# Altium PCB ZondPhonoPreamp.PcbDoc
Units mm, origin at the board's own origin, x right, y up, seen from the top; angles counter-clockwise.
Board outline 160.02 x 159.38 mm, 2 copper layers (Top Layer, Bottom Layer); 132 components, 61 nets, 302 pads, 30 vias.
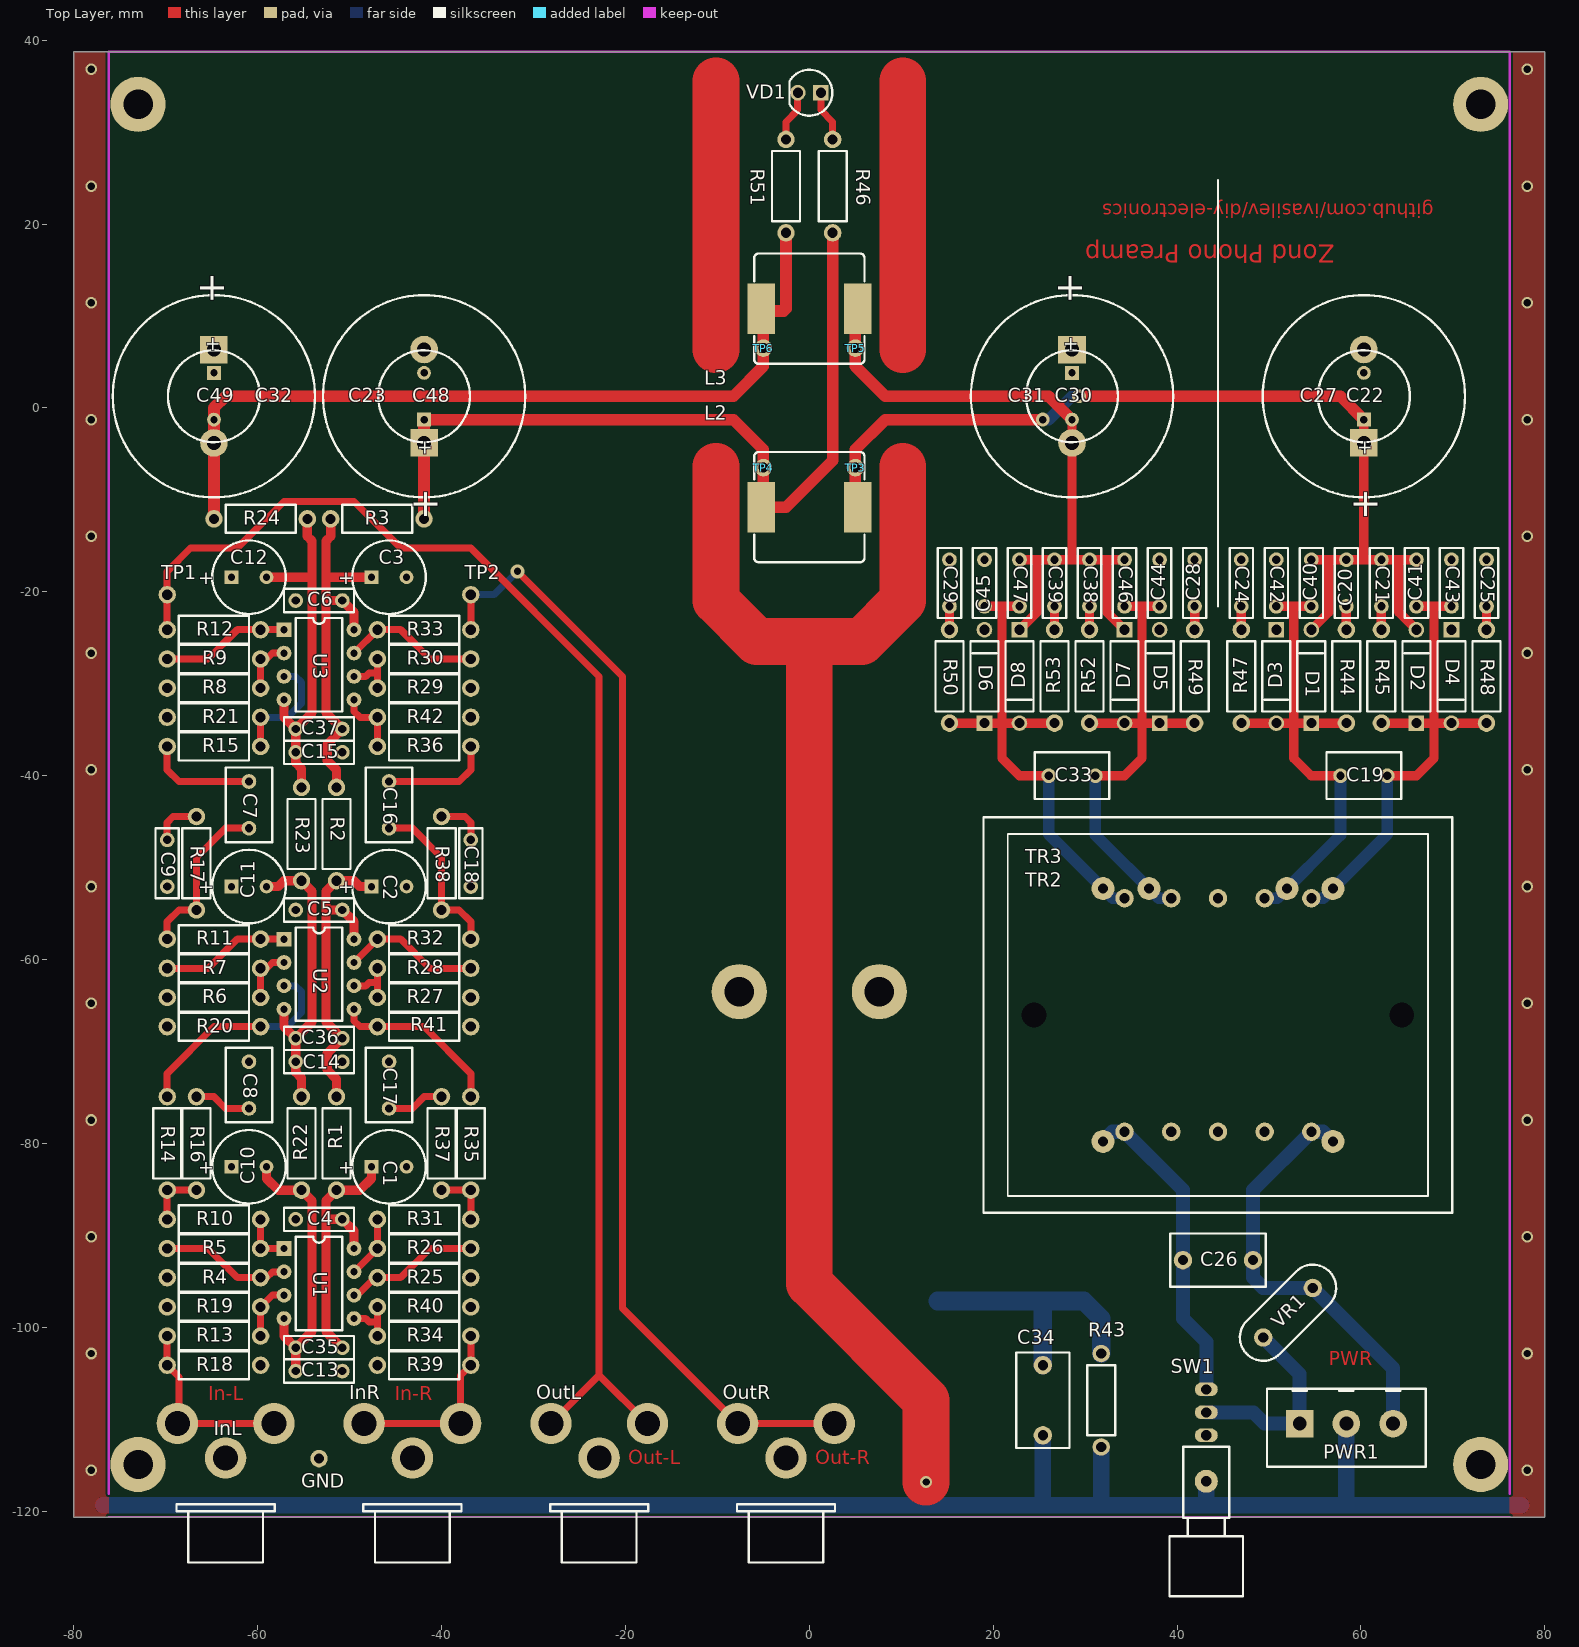
[diagram p0: Top Layer view]
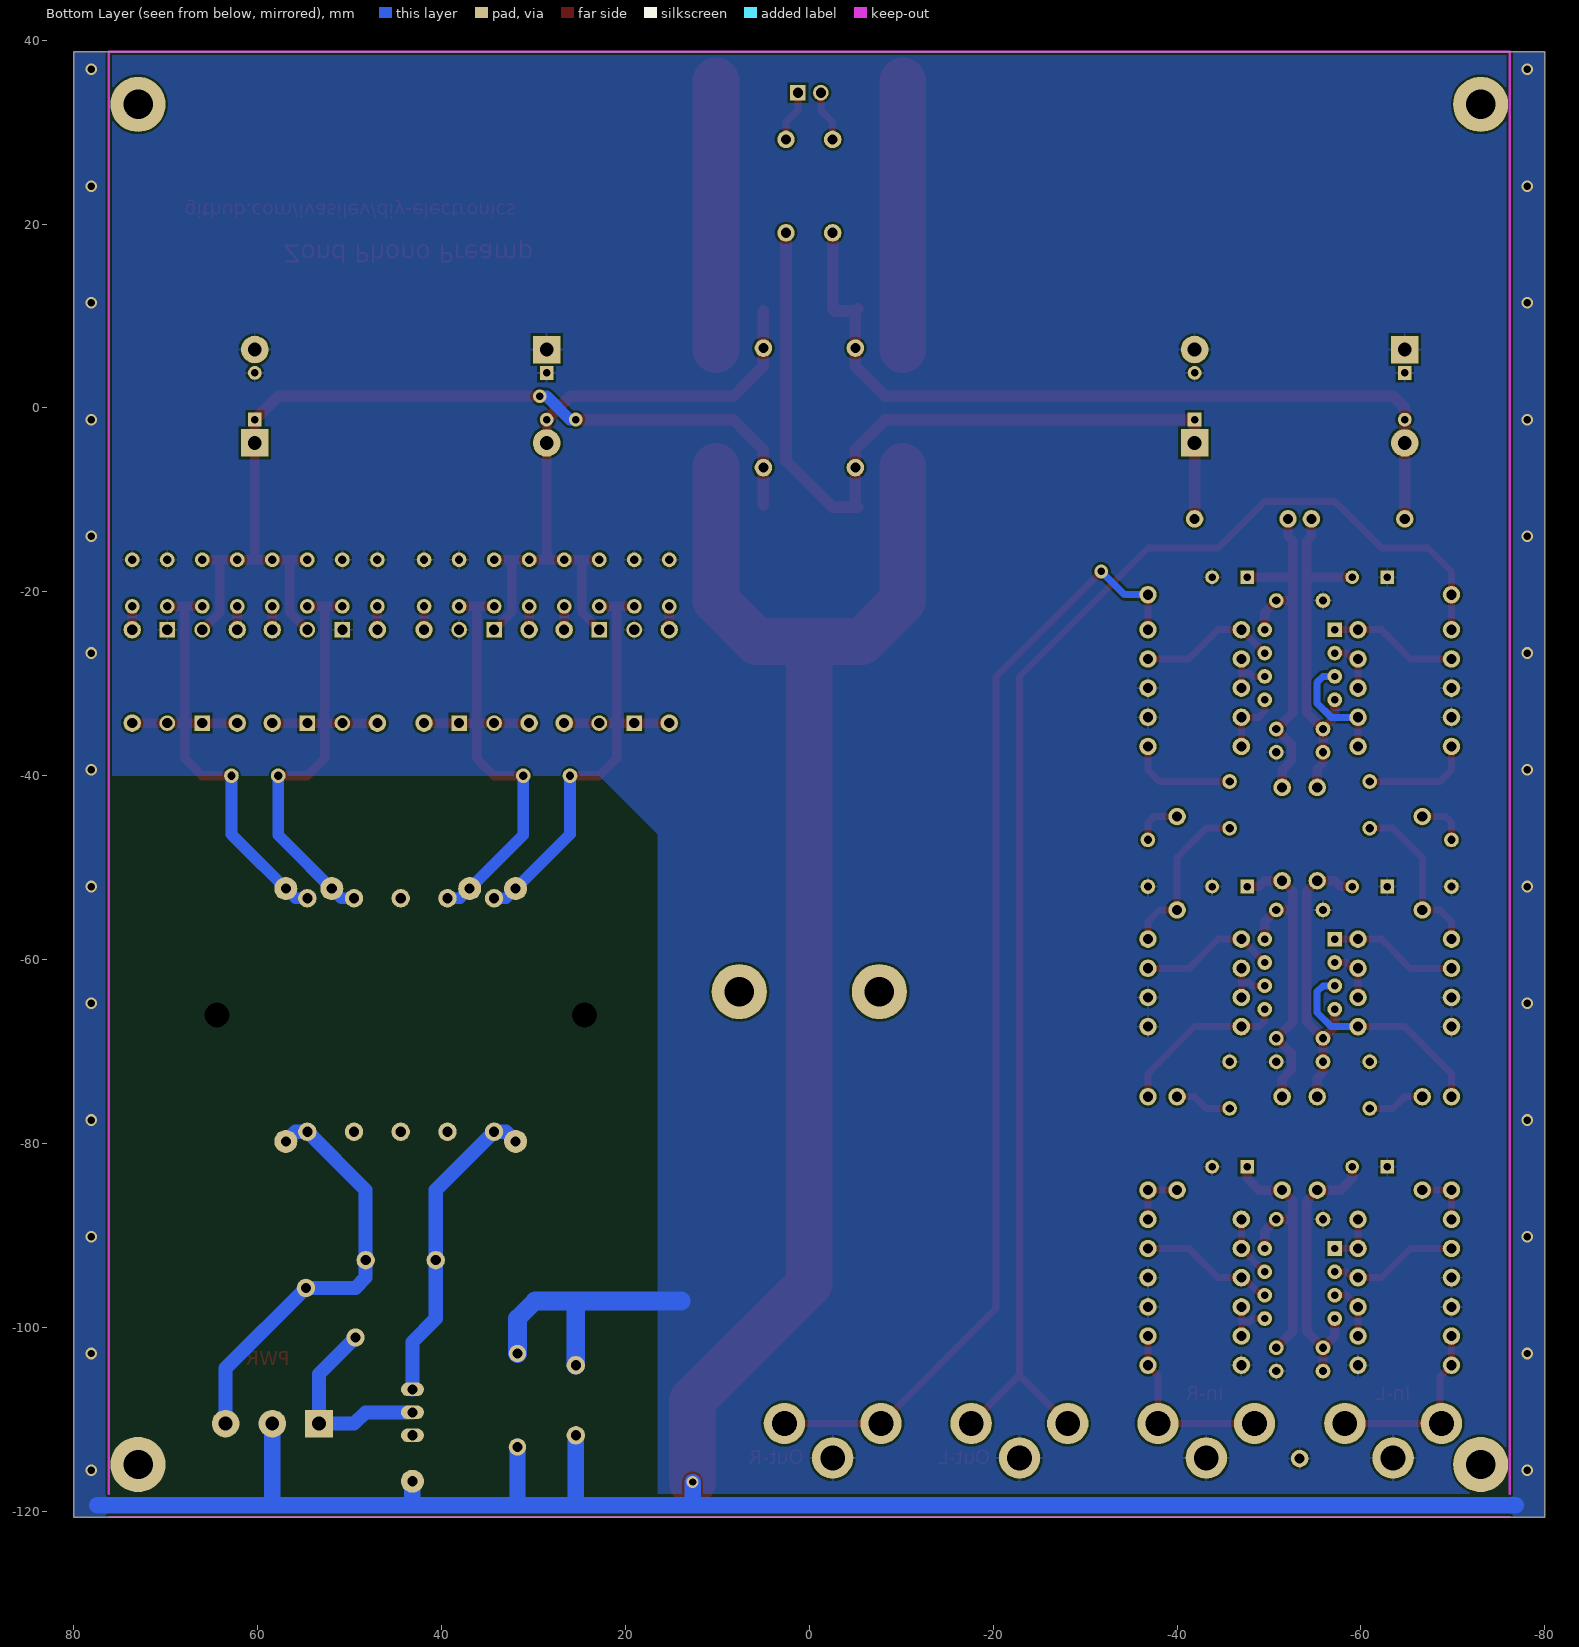
[diagram p1: Bottom Layer view, seen from below]

## Layer stack, top to bottom
Top Layer: signal copper 0.0356
Dielectric: dielectric 0.32, FR-4, Dk 4.8
Bottom Layer: signal copper 0.0356

## Board outline
-80.01,-120.65 -80.01,38.735 80.01,38.735 80.01,-120.65

## Design rules (kind name [scope] priority, off if disabled: settings)
Clearance [All] p1: gap=0.254
ComponentClearance [All] p1: gap=0.254 collisioncheckmode=3 verticalgap=0.254
Height [All] p1: minheight=0 maxheight=50.8 prefheight=12.7
HoleSize [All] p1: absolutevalues=TRUE maxlimit=3.81 minlimit=0.597 maxpercent=80.000 minpercent=20.000
PolygonConnect PolygonConnect_1 [IsVia] p1: connectstyle=Direct reliefconductorwidth=0.254 reliefentries=4 polygonreliefangle="90 Angle"
PolygonConnect [All] p2: connectstyle=Relief reliefconductorwidth=0.254 reliefentries=4 polygonreliefangle="90 Angle"
RoutingVias [All] p1: holewidth=0.711 width=1.27 viastyle="Through Hole" minholewidth=0.711 minwidth=1.27 maxholewidth=0.711 maxwidth=1.27
SolderMaskExpansion [All] p1: expansion=0.102
TestPointUsage [All] p1: valid=0 allowmultiple=FALSE
Testpoint [All] p1: side=15 testpointundercomponent=TRUE minsize=1.016 maxsize=2.54 preferedsize=1.524 minholesize=0 maxholesize=1.016 preferedholesize=0.813 testpointgrid=0.025 style=1023 order=0123456789
Width [All] p1: maxlimit=5.08 minlimit=0.254 preferedwidth=0.254 minimp=50.000000 maximp=50.000000 favimp=50.000000
16 further rules are at their usual default settings.

## Classes and differential pairs
component class U_Power: C19 C20 C21 C22 C23 C24 C25 C26 C27 C28 C29 C30 C31 C32 C33 C34 C38 C39 C40 C41 C42 C43 C44 C45 C46 C47 C48 C49 D1 D2 D3 D4 D5 D6 D7 D8 GND L2 L3 PWR1 R43 R44 R45 R46 R47 R48 R49 R50 R51 R52 R53 SW1 TP3 TP4 TP5 TP6 TR2 TR3 VD1 VR1
component class U_Amplifier_Right: C16 C17 C18 InR OutR R25 R26 R27 R28 R29 R30 R31 R32 R33 R34 R35 R36 R37 R38 R39 R40 R41 R42 TP2
component class U_Amplifier_Left: C1 C2 C3 C4 C5 C6 C7 C8 C9 C10 C11 C12 C13 C14 C15 C35 C36 C37 InL OutL R1 R2 R3 R4 R5 R6 R7 R8 R9 R10 R11 R12 R13 R14 R15 R16 R17 R18 R19 R20 R21 R22 R23 R24 TP1 U1 U2 U3

## Components (designator, comment, footprint, x,y, rotation, side; value= is the part's Value field where it differs from the comment)
C1 "220uF/25V" CAP_EC8x16 -45.72,-82.55 r0 top
C2 "220uF/25V" CAP_EC8x16 -45.72,-52.07 r0 top
C3 "220uF/25V" CAP_EC8x16 -45.72,-18.415 r0 top
C4 "100nF" CAP_C200 -50.8,-88.265 r180 top
C5 "100nF" CAP_C200 -50.8,-54.61 r180 top
C6 "100nF" CAP_C200 -50.8,-20.955 r180 top
C7 "220nF" CAP_C200-1 -60.96,-45.72 r90 top
C8 "220nF" CAP_C200-1 -60.96,-76.2 r90 top
C9 "10nF" CAP_C200 -69.85,-46.99 r270 top
C10 "220uF/25V" CAP_EC8x16 -60.96,-82.55 r0 top
C11 "220uF/25V" CAP_EC8x16 -60.96,-52.07 r0 top
C12 "220uF/25V" CAP_EC8x16 -60.96,-18.415 r0 top
C13 "100nF" CAP_C200 -55.88,-104.775 r0 top
C14 "100nF" CAP_C200 -55.88,-71.12 r0 top
C15 "100nF" CAP_C200 -55.88,-37.465 r0 top
C16 "220nF" CAP_C200-1 -45.72,-45.72 r90 top
C17 "220nF" CAP_C200-1 -45.72,-76.2 r90 top
C18 "10nF" CAP_C200 -36.83,-46.99 r270 top
C19 "100nF" CAP_C200-1 62.865,-40.005 r180 top
C20 "100nF" CAP_C200 58.42,-16.51 r270 top
C21 "100nF" CAP_C200 62.23,-16.51 r270 top
C22 "22uF/10V" CAP_EC10x20 60.325,1.27 r90 top
C23 "4700uF/35V" CAP_EC22x40 -41.91,1.27 r90 top
C24 "100nF" CAP_C200 46.99,-21.59 r90 top
C25 "100nF" CAP_C200 73.66,-21.59 r90 top
C26 "100nF/400VDC - WIMA MKP10" CAP_5.7x10.3RM7.5 44.45,-92.71 r0 top
C27 "22uF/10V" CAP_EC22x40 60.325,1.27 r90 top
C28 "100nF" CAP_C200 41.91,-16.51 r270 top
C29 "100nF" CAP_C200 15.24,-16.51 r270 top
C30 "22uF/10V" CAP_EC10x20 28.575,1.27 r270 top
C31 "22uF/10V" CAP_EC22x40 28.575,1.27 r270 top
C32 "4700uF/35V" CAP_EC22x40 -64.77,1.27 r270 top
C33 "100nF" CAP_C200-1 31.115,-40.005 r180 top
C34 "2.2nF/250V" CAP_5.7x10.3RM7.5 25.4,-107.95 r90 top
C35 "100nF" CAP_C200 -50.8,-102.235 r180 top
C36 "100nF" CAP_C200 -50.8,-68.58 r180 top
C37 "100nF" CAP_C200 -50.8,-34.925 r180 top
C38 "100nF" CAP_C200 30.48,-21.59 r90 top
C39 "100nF" CAP_C200 26.67,-21.59 r90 top
C40 "100nF" CAP_C200 54.61,-16.51 r270 top
C41 "100nF" CAP_C200 66.04,-16.51 r270 top
C42 "100nF" CAP_C200 50.8,-21.59 r90 top
C43 "100nF" CAP_C200 69.85,-21.59 r90 top
C44 "100nF" CAP_C200 38.1,-16.51 r270 top
C45 "100nF" CAP_C200 19.05,-16.51 r270 top
C46 "100nF" CAP_C200 34.29,-21.59 r90 top
C47 "100nF" CAP_C200 22.86,-21.59 r90 top
C48 "22uF/10V" CAP_EC10x20 -41.91,1.27 r90 top
C49 "22uF/10V" CAP_EC10x20 -64.77,1.27 r270 top
D1 "1N4007" DIODE_D400 54.61,-29.21 r90 top
D2 "1N4007" DIODE_D400 66.04,-29.21 r90 top
D3 "1N4007" DIODE_D400 50.8,-29.21 r270 top
D4 "1N4007" DIODE_D400 69.85,-29.21 r270 top
D5 "1N4007" DIODE_D400 38.1,-29.21 r90 top
D6 "1N4007" DIODE_D400 19.05,-29.21 r90 top
D7 "1N4007" DIODE_D400 34.29,-29.21 r270 top
D8 "1N4007" DIODE_D400 22.86,-29.21 r270 top
GND "TESTPAD" MISC_PAD-36/65#1 -53.34,-114.3 r90 top (schematic designator TP7)
InL "Pro Signal PSG01547" CON_RCA_PSG01547 -63.5,-117.475 r180 top
InR "Pro Signal PSG01547" CON_RCA_PSG01547 -43.18,-117.475 r180 top
L2 "39nH" IND_SRI1205 0,-10.795 r180 top
L3 "39nH" IND_SRI1205 0,10.795 r180 top
OutL "Pro Signal PSG01547" CON_RCA_PSG01547 -22.86,-117.475 r180 top
OutR "Pro Signal PSG01547" CON_RCA_PSG01547 -2.54,-117.475 r180 top
PWR1 "CON3" CON_TOP_3P 58.42,-110.49 r0 top
R1 "47.5" RES_R400 -51.435,-74.93 r270 top
R2 "47.5" RES_R400 -51.435,-41.275 r270 top
R3 "47.5" RES_R400 -41.91,-12.065 r180 top
R4 "1.30k" RES_R400 -59.69,-94.615 r180 top
R5 "13.0k" RES_R400 -59.69,-91.44 r180 top
R6 "1.30k" RES_R400 -59.69,-64.135 r180 top
R7 "13.0k" RES_R400 -69.85,-60.96 r0 top
R8 "1.43k" RES_R400 -59.69,-30.48 r180 top
R9 "13.0k" RES_R400 -69.85,-27.305 r0 top
R10 "13.0k" RES_R400 -69.85,-88.265 r0 top
R11 "8.45k" RES_R400 -69.85,-57.785 r0 top
R12 "332" RES_R400 -69.85,-24.13 r0 top
R13 "332" RES_R400 -59.69,-100.965 r180 top
R14 "332" RES_R400 -69.85,-74.93 r270 top
R15 "332" RES_R400 -59.69,-36.83 r180 top
R16 "1.43k" RES_R400 -66.675,-85.09 r90 top
R17 "332" RES_R400 -66.675,-54.61 r90 top
R18 "???" RES_R400 -59.69,-104.14 r180 top
R19 "47.5k" RES_R400 -59.69,-97.79 r180 top
R20 "47.5k" RES_R400 -59.69,-67.31 r180 top
R21 "47.5k" RES_R400 -59.69,-33.655 r180 top
R22 "47.5" RES_R400 -55.245,-74.93 r270 top
R23 "47.5" RES_R400 -55.245,-41.275 r270 top
R24 "47.5" RES_R400 -64.77,-12.065 r0 top
R25 "1.30k" RES_R400 -46.99,-94.615 r0 top
R26 "13.0k" RES_R400 -46.99,-91.44 r0 top
R27 "1.30k" RES_R400 -46.99,-64.135 r0 top
R28 "13.0k" RES_R400 -36.83,-60.96 r180 top
R29 "1.43k" RES_R400 -46.99,-30.48 r0 top
R30 "13.0k" RES_R400 -36.83,-27.305 r180 top
R31 "13.0k" RES_R400 -36.83,-88.265 r180 top
R32 "8.45k" RES_R400 -36.83,-57.785 r180 top
R33 "332" RES_R400 -36.83,-24.13 r180 top
R34 "332" RES_R400 -46.99,-100.965 r0 top
R35 "332" RES_R400 -36.83,-74.93 r270 top
R36 "332" RES_R400 -46.99,-36.83 r0 top
R37 "1.43k" RES_R400 -40.005,-85.09 r90 top
R38 "332" RES_R400 -40.005,-54.61 r90 top
R39 "???" RES_R400 -46.99,-104.14 r0 top
R40 "47.5k" RES_R400 -46.99,-97.79 r0 top
R41 "47.5k" RES_R400 -46.99,-67.31 r0 top
R42 "47.5k" RES_R400 -46.99,-33.655 r0 top
R43 "10k" RES_R400 31.75,-113.03 r90 top
R44 "10" RES_R400 58.42,-34.29 r90 top
R45 "10" RES_R400 62.23,-34.29 r90 top
R46 "1k" RES_R400 2.54,29.21 r270 top
R47 "10" RES_R400 46.99,-24.13 r270 top
R48 "10" RES_R400 73.66,-24.13 r270 top
R49 "10" RES_R400 41.91,-34.29 r90 top
R50 "10" RES_R400 15.24,-34.29 r90 top
R51 "1k" RES_R400 -2.54,19.05 r90 top
R52 "10" RES_R400 30.48,-24.13 r270 top
R53 "10" RES_R400 26.67,-24.13 r270 top
SW1 "SW" SW_250VAC1.5A 43.18,-111.76 r0 top
TP1 "TESTPAD" MISC_PAD-36/65#1 -69.85,-20.32 r0 top
TP2 "TESTPAD" MISC_PAD-36/65#1 -36.83,-20.32 r90 top
TP3 "TESTPAD" MISC_PAD-36/65#2 8.89,-6.985 r90 top
TP4 "TESTPAD" MISC_PAD-36/65#3 -9.525,-5.08 r90 top
TP5 "TESTPAD" MISC_PAD-36/65#4 8.89,6.35 r90 top
TP6 "TESTPAD" MISC_PAD-36/65#5 -10.795,5.715 r90 top
TR2 "ANG6VA_9+9" TRAF_ANG6VA 44.45,-66.04 r180 top
TR3 "MYRRA_4427x" TRAF_MYRRA_10VA 44.45,-66.04 r180 top
U1 "LM4562" IC_DIP-8 -53.34,-95.25 r270 top
U2 "LM4562" IC_DIP-8 -53.34,-61.595 r270 top
U3 "LM4562" IC_DIP-8 -53.34,-27.94 r270 top
VD1 "LED" LED_5MM 0,34.29 r180 top
VR1 "275V" MISC_Varistor 52.07,-98.425 r225 top

## Footprints (in the part's own frame and the unit in brackets; to place one, negate y for a bottom-side part, rotate by r counter-clockwise, add the part's x,y. Pads: shape width x height; smd on the part's side, far side on the other; paste and mask are expansions set on the pad)
CAP_5.7x10.3RM7.5 [mm]
  round 2 hole 1.1: 1(-3.81,0) 2(3.81,0)
  silkscreen extent -5.2,-2.9 5.2,2.9
CAP_C200 [mm]
  round 1.6 hole 0.9: 1(0,0) 2(5.08,0)
  silkscreen extent -1.27,-1.27 6.35,1.27
CAP_C200-1 [mm]
  round 1.6 hole 0.9: 1(0,0) 2(5.08,0)
  silkscreen extent -1.52,-2.54 6.6,2.54
CAP_EC8x16 [mm] "1000uF/6.3V;1000uF/10V;1000uF/16V;470uF/25V;220uF/35V;100uF/50V;100uF/63V;33uF/100V;4.7uF/160V;3.3uF/200V;2.2uF/250V;1uF/400V;1uF/450V"
  rect 1.5x1.5 hole 0.8: 1(-1.905,0)
  round 1.5 hole 0.8: 2(1.905,0)
  silkscreen extent -4,-4 4,4
CAP_EC10x20 [mm] "3300uF/6.3V;2200uF/10V;1000uF/25V;680uF/35V;330uF/50V;220uF/63V;100uF/100V;33uF/160V;33uF/200V;22uF/250V;10uF/350V;10uF/400V;6.8uF/450V"
  rect 1.5x1.5 hole 0.8: 1(-2.54,0)
  round 1.5 hole 0.8: 2(2.54,0)
  silkscreen extent -5,-5 5,5
CAP_EC22x40 [mm] "2200uF/6.3V;15000uF/16V;10000uF/25V;6800uF/35V;4700uF/50V;3300uF/63V;470uF/160V;470uF/200V;220uF/250V;100uF/400V;100uF/450V"
  rect 3x3 hole 1.5: 1(-5.08,0)
  round 3 hole 1.5: 2(5.08,0)
  silkscreen extent -11,-11 11,11
CON_RCA_PSG01547 [mm] "Pro Signal PSG01547"
  round 4.5 hole 2.7: 1(0,-3.25) 2(-5.25,-7) 2(5.25,-7)
  silkscreen extent -5.33,1.78 5.33,8.13
CON_TOP_3P [mm] "Weidumuller - SL 5.08/3/180B"
  rect 3x3 hole 1.5: 1(-5.08,0)
  round 3 hole 1.5: 2(0,0) 3(5.08,0)
  silkscreen extent -8.64,-4.7 8.64,3.81
DIODE_D400 [mm] "Diode"
  rect 1.7x1.7 hole 1.1: 1(-5.08,0)
  round 1.7 hole 1.1: 2(5.08,0)
  silkscreen extent -3.81,-1.52 3.81,1.52
IC_DIP-8 [mm] "DIP8"
  rect 1.6x1.6 hole 0.8: 1(-3.81,-3.81)
  round 1.6 hole 0.8: 2(-1.27,-3.81) 3(1.27,-3.81) 4(3.81,-3.81) 5(3.81,3.81) 6(1.27,3.81) 7(-1.27,3.81) 8(-3.81,3.81)
  silkscreen extent -5.08,-2.54 5.08,2.54
IND_SRI1205 [mm]
  rect 3x5.5 smd: 1(-5.25,0) 2(5.25,0)
  silkscreen extent -6,-6 6,6
LED_5MM [mm] "LED 5MM"
  rect 1.7x1.7 hole 1.1: 1(-1.25,0)
  round 1.7 hole 1.1: 2(1.25,0)
  silkscreen extent -2.5,-2.5 2.17,2.5
MISC_PAD-36/65#1 [mm]
  round 1.9 hole 1.1: 1(0,0)
MISC_PAD-36/65#2 [mm]
  round 1.9 hole 1.1: 1(0.485,3.89)
MISC_PAD-36/65#3 [mm]
  round 1.9 hole 1.1: 1(-1.42,-4.525)
MISC_PAD-36/65#4 [mm]
  round 1.9 hole 1.1: 1(0.15,3.89)
MISC_PAD-36/65#5 [mm]
  round 1.9 hole 1.1: 1(0.785,-5.795)
MISC_Varistor [mm]
  round 2 hole 1.1: 1(-3.81,0) 2(3.81,0)
  silkscreen extent -6.35,-2.54 6.35,2.54
RES_R400 [mm]
  round 1.9 hole 1.1: 1(0,0) 2(10.16,0)
  silkscreen extent 1.27,-1.52 8.89,1.52
SW_250VAC1.5A [mm]
  round 2.5 hole 1.1: 0(0,-5)
  oval 2.5x1.5 hole 1.1: 1(0,0) 2(0,2.5) 3(0,5)
  silkscreen extent -4,-17.5 4,-1.25
TRAF_ANG6VA [mm] "Transformer ANG 6VA"
  round 2 hole 1.1: 1(-10.16,12.7) 2(-5.08,12.7) 3(0,12.7) 4(5.08,12.7) 5(10.16,12.7) 6(10.16,-12.7) 7(5.08,-12.7) 8(0,-12.7) 9(-5.08,-12.7) 10(-10.16,-12.7)
  silkscreen extent -22.86,-19.69 22.86,19.69
TRAF_MYRRA_10VA [mm] "Transformer, Myrra, 10VA"
  round 2 hole 2.7: 0(-20,0) 0(20,0)
  round 2.5 hole 1.1: 1(-12.5,13.75) 6(12.5,13.75) 7(12.5,-13.75) 8(7.5,-13.75) 11(-7.5,-13.75) 12(-12.5,-13.75)
  silkscreen extent -25.5,-21.5 25.5,21.5

## Part data
C1 C2 C3 C10 C11 C12 C22 C23 C27 C30 C31 C32 C48 C49: library part ELECTRO1, "Electrolytic Capacitor"
C4 C5 C6 C7 C8 C9 C13 C14 C15 C16 C17 C18 C19 C20 C21 C24 C25 C26 C28 C29 C33 C34 C35 C36 C37 C38 C39 C40 C41 C42 C43 C44 C45 C46 C47: library part CAP, "Capacitor"
D1 D2 D3 D4 D5 D6 D7 D8: library part DIODE, "Diode"
InL InR OutL OutR: library part CON2, "Connector"
L2 L3: library part "INDUCTOR IRON1"
PWR1: "Connector"
R1 R2 R3 R4 R5 R6 R7 R8 R9 R10 R11 R12 R13 R14 R15 R16 R17 R18 R19 R20 R21 R22 R23 R24 R25 R26 R27 R28 R29 R30 R31 R32 R33 R34 R35 R36 R37 R38 R39 R40 R41 R42 R43 R44 R45 R46 R47 R48 R49 R50 R51 R52 R53: library part RES, "Resistor"
SW1: library part SW_2WAY
TR2: library part TRAF_ANG6VAx+x
TR3: library part TRAF_MYRRA_10VA_D
U1 U2 U3: library part OPAMP_Dual, "standard dual op-amp"
VD1: "LED, 3mm"
VR1: library part VARISTOR, "Resistor"

## Free pads (board coordinates)
  round 6 hole 3.2 unplated: 7(-73.025,-114.935) 7(-73.025,33.02) 7(-7.62,-63.5) 7(7.62,-63.5) 7(73.025,-114.935) 7(73.025,33.02)

## Via types
v1: diameter 1.27, hole 0.8, Top Layer to Bottom Layer, tented both sides, 26 vias
v2: diameter 1.5, hole 0.8, Top Layer to Bottom Layer, tented both sides, 3 vias
v3: diameter 1.3, hole 0.8, Top Layer to Bottom Layer, 1 vias

## Nets (pads, with @x,y where several pads share a name; then routed paths per layer and width w, separated by ;. In a path a pad name is that pad's centre, name@x,y a point inside that pad or via, vN(x,y) a via of type N, cw(c..) or ccw(c..) an arc to the next point about the centre after c; other vN are vias at no path point)
GND: C1.2 C2.2 C3.2 C4.2 C5.2 C6.2 C8.2 C9.2 C10.1 C11.1 C12.1 C13.2 C14.2 C15.2 C17.2 C18.2 C22.2 C23.2 C24.2 C25.2 C27.2 C28.1 C29.1 C30.1 C31.1 C32.1 C34.2 C42.2 C43.2 C44.1 C45.1 C48.2 C49.1 D3.1 D4.1 D5.2 D6.2 GND.1 InL.1 InR.1 OutL.1 OutR.1 R4.2 R6.2 R8.2 R18.1 R19.2 R20.2 R21.2 R25.2 R27.2 R29.2 R39.1 R40.2 R41.2 R42.2 R43.2 | length 29.4
  Bottom Layer w2.032: 13.97,-97.155 29.845,-97.155 31.75,-99.06 R43.2 ; C34.2 25.4,-97.155
NetC1_1: C1.1 C4.1 C35.1 R1.2 U1.8 | length 29.4
  Top Layer w1.016: -52.578,-88.265 C4.1 -49.53,-89.535 U1.8 ; C35.1 -52.578,-100.457 -52.578,-86.233 R1.2 -48.895,-85.09 -47.625,-83.82 C1.1
NetC2_1: C2.1 C5.1 C36.1 R1.1 R2.2 U2.8 | length 35.4
  Top Layer w1.016: -52.578,-54.61 C5.1 -49.53,-55.88 U2.8 ; R1.1 -51.435,-73.025 -52.451,-72.009 -52.451,-70.231 C36.1 -52.578,-66.802 -52.578,-52.578 R2.2 -49.53,-51.435 -48.895,-52.07 C2.1
NetC3_1: C3.1 C6.1 C37.1 R2.1 R3.2 U3.8 | length 41.7
  Top Layer w1.016: -52.578,-20.955 C6.1 -49.53,-22.225 U3.8 ; -52.578,-18.415 C3.1 ; R3.2 -52.07,-13.97 -52.578,-14.478 -52.578,-33.147 C37.1 -52.451,-36.576 -52.451,-38.354 -51.435,-39.37 R2.1
NetC7_1: C7.1 R11.1 R17.1 | length 18.4
  Top Layer w0.762: R11.1 -69.85,-55.88 -68.58,-54.61 R17.1 -66.675,-48.895 -63.5,-45.72 C7.1
NetC7_2: C7.2 R15.2 | length 12
  Top Layer w0.762: R15.2 -69.85,-39.37 -68.58,-40.64 C7.2
NetC8_1: C8.1 R16.2 | length 6.2
  Top Layer w0.762: R16.2 -64.77,-74.93 -63.5,-76.2 C8.1
NetC9_1: C9.1 R17.2 | length 5.3
  Top Layer w0.762: C9.1 -69.85,-45.085 -69.215,-44.45 R17.2
NetC10_2: C10.2 C13.1 C35.2 R22.2 U1.4 | length 30.2
  Top Layer w1.016: C10.2 -59.055,-83.82 -57.785,-85.09 R22.2 -54.102,-86.233 -54.102,-100.457 C35.2 ; U1.4 -57.15,-100.965 C35.2 ; C13.1 C35.2
NetC11_2: C11.2 C14.1 C36.2 R22.1 R23.2 U2.4 | length 32.7
  Top Layer w1.016: C11.2 -57.785,-52.07 -57.15,-51.435 R23.2 -54.102,-52.578 -54.102,-66.802 C36.2 ; U2.4 -57.15,-67.31 C36.2 ; R22.1 -55.245,-72.898 -55.88,-72.263 C36.2
NetC12_2: C12.2 C15.1 C37.2 R23.1 R24.2 U3.4 | length 39.1
  Top Layer w1.016: C12.2 -54.102,-18.415 ; U3.4 -57.15,-33.655 C37.2 ; R23.1 -55.245,-39.243 -55.88,-38.608 C37.2 ; R24.2 -54.61,-13.97 -54.102,-14.478 -54.102,-33.147 C37.2
NetC16_1: C16.1 R32.1 R38.1 | length 18.4
  Top Layer w0.762: C16.1 -43.18,-45.72 -40.005,-48.895 R38.1 -38.1,-54.61 -36.83,-55.88 R32.1
NetC16_2: C16.2 R36.2 | length 12
  Top Layer w0.762: C16.2 -38.1,-40.64 -36.83,-39.37 R36.2
NetC17_1: C17.1 R37.2 | length 6.2
  Top Layer w0.762: C17.1 -43.18,-76.2 -41.91,-74.93 R37.2
NetC18_1: C18.1 R38.2 | length 5.3
  Top Layer w0.762: R38.2 -37.465,-44.45 -36.83,-45.085 C18.1
NetC19_1: C19.1 C41.2 C43.1 D2.1 D4.2 R45.1 R48.2 TR2.10 TR3.12 | length 55.1
  Top Layer w1.016: R45.1 R48.2 ; C19.1 66.04,-40.005 67.945,-38.1 67.945,-21.59 ; C41.2 C43.1
  Bottom Layer w1.27: TR2.10 55.9,-53.34 62.865,-46.375 C19.1
NetC19_2: C19.2 C40.2 C42.1 D1.1 D3.2 R44.1 R47.2 TR2.9 TR3.11 | length 55.2
  Top Layer w1.016: R47.2 R44.1 ; C42.1 C40.2 ; 52.705,-21.59 52.705,-38.1 54.61,-40.005 C19.2
  Bottom Layer w1.27: TR2.9 50.9,-53.34 57.785,-46.455 C19.2
NetC20_1: C20.1 C21.1 C22.1 C27.1 C40.1 C41.1 D1.2 D2.2 L2.1 TP3.1 | length 108.3
  Top Layer w1.016: D1.2 56.515,-22.225 56.515,-16.51 ; C40.1 C41.1 ; 60.325,-16.51 C22.1 ; 64.135,-16.51 64.135,-22.225 D2.2
  Top Layer w1.27: L2.1@5,-10.545 TP3.1 5,-4.525 8.255,-1.27 v2(25.4,-1.27) ; v2(29.337,1.27) 57.785,1.27 C22.1
  Bottom Layer w1.27: v2(25.4,-1.27) 26.035,-1.27 28.575,1.27 v2(29.337,1.27)
NetC20_2: C20.2 R44.2 | length 5.1
  Top Layer w1.016: R44.2 C20.2 R44.2
NetC21_2: C21.2 R45.2 | length 5.1
  Top Layer w1.016: R45.2 C21.2 R45.2
NetC24_1: C24.1 R47.1 | length 2.5
  Top Layer w1.016: R47.1 C24.1
NetC25_1: C25.1 R48.1 | length 2.5
  Top Layer w1.016: R48.1 C25.1
NetC26_1: C26.1 SW1.3 TR2.5 TR3.6 | length 34.5
  Bottom Layer w1.524: TR3.6 33,-78.74 TR2.5 40.64,-85.09 40.64,-99.06 43.18,-101.6 SW1.3@43.18,-106.76
NetC26_2: C26.2 PWR1.3 TR2.1 TR3.1 VR1.1 | length 46.6
  Bottom Layer w1.524: TR3.1 55.9,-78.74 TR2.1 48.26,-85.09 48.26,-94.615 49.376,-95.731 VR1.1 63.5,-104.467 PWR1.3
NetC28_2: C28.2 R49.2 | length 2.5
  Top Layer w1.016: R49.2 C28.2
NetC29_2: C29.2 R50.2 | length 2.5
  Top Layer w1.016: R50.2 C29.2
NetC30_2: C30.2 C31.2 C38.2 C39.2 C46.2 C47.2 D7.1 D8.1 L3.1 TP5.1 | length 75.5
  Top Layer w1.016: D8.1 24.765,-22.225 24.765,-16.51 ; C47.2 C46.2 ; 28.575,-16.51 C30.2 ; 32.385,-16.51 32.385,-22.225 D7.1
  Top Layer w1.27: L3.1@5,10.545 TP5.1 5,4.525 8.255,1.27 26.035,1.27 C30.2
NetC33_1: C33.1 C44.2 C46.1 D5.1 D7.2 R49.1 R52.2 TR2.7 TR3.8 | length 55.2
  Top Layer w1.016: R52.2 R49.1 ; C33.1 34.29,-40.005 36.195,-38.1 36.195,-21.59 ; C46.1 C44.2
  Bottom Layer w1.27: C33.1 31.115,-46.455 38,-53.34 TR2.7
NetC33_2: C33.2 C45.2 C47.1 D6.1 D8.2 R50.1 R53.2 TR2.6 TR3.7 | length 55.1
  Top Layer w1.016: R50.1 R53.2 ; C45.2 C47.1 ; 20.955,-21.59 20.955,-38.1 22.86,-40.005 C33.2
  Bottom Layer w1.27: C33.2 26.035,-46.375 33,-53.34 TR2.6
NetC38_1: C38.1 R52.1 | length 5.1
  Top Layer w1.016: R52.1 C38.1 R52.1
NetC39_1: C39.1 R53.1 | length 5.1
  Top Layer w1.016: R53.1 C39.1 R53.1
NetInL_2: InL.2 R13.2 R18.2 | length 20.6
  Top Layer w0.762: R13.2 R18.2 -68.58,-105.41 InL.2@-68.58,-110.49 ; InL.2@-68.75,-110.475 InL.2@-58.25,-110.475
NetInR_2: InR.2 R34.2 R39.2 | length 20.5
  Top Layer w0.762: InR.2@-48.43,-110.475 -37.93,-110.475 -37.93,-105.24 R39.2 R34.2 ; InR.2@-38.1,-110.49 InR.2@-38.1,-110.475
NetOutL_2: OutL.2 R12.1 TP1.1 | length 155.3
  Top Layer w0.762: R12.1 -69.85,-17.78 -67.31,-15.24 -62.23,-15.24 -57.15,-10.16 -49.53,-10.16 -44.45,-15.24 -36.83,-15.24 -22.86,-29.21 -22.86,-105.225 ; OutL.2@-28.11,-110.475 -22.86,-105.225 ; OutL.2@-17.61,-110.475 -22.86,-105.225
NetOutR_2: OutR.2 R33.1 TP2.1 | length 123.1
  Top Layer w0.762: R33.1 TP2.1 ; v2(-31.75,-17.78) -20.32,-29.21 -20.32,-97.945 -7.79,-110.475 OutR.2@2.71,-110.475
  Bottom Layer w0.762: TP2.1 -34.29,-20.32 v2(-31.75,-17.78)
NetPWR1_1: PWR1.1 SW1.2 VR1.2 | length 21.7
  Bottom Layer w1.524: SW1.2 48.3,-109.26 ; 48.3,-109.26 49.53,-110.49 PWR1.1 53.34,-105.083 VR1.2
NetR4_1: R4.1 R5.2 U1.2 | length 14.3
  Top Layer w0.762: R5.2 -65.405,-91.44 -62.23,-94.615 -59.055,-94.615 -58.42,-93.98 U1.2
NetR5_1: R5.1 R10.2 U1.1 | length 5.7
  Top Layer w0.762: R10.2 R5.1 U1.1
NetR6_1: R6.1 R7.2 U2.2 | length 6
  Top Layer w0.762: R6.1 R7.2 -59.055,-60.96 -58.42,-60.325 U2.2
NetR7_1: R7.1 R11.2 U2.1 | length 14
  Top Layer w0.762: R7.1 -65.405,-60.96 -62.23,-57.785 U2.1
NetR8_1: R8.1 R9.2 U3.2 | length 6
  Top Layer w0.762: R8.1 R9.2 -59.055,-27.305 -58.42,-26.67 U3.2
NetR9_1: R9.1 R12.2 U3.1 | length 14
  Top Layer w0.762: R9.1 -65.405,-27.305 -62.23,-24.13 U3.1
NetR10_1: R10.1 R14.2 R16.1 | length 6.3
  Top Layer w0.762: R10.1 R14.2 R16.1
NetR13_1: R13.1 R19.1 U1.3 | length 6.2
  Top Layer w0.762: R13.1 R19.1 -58.42,-96.52 U1.3
NetR14_1: R14.1 R20.1 U2.3 | length 24.3
  Top Layer w0.762: R14.1 -69.85,-72.39 -64.77,-67.31 R20.1
  Bottom Layer w0.762: R20.1 -56.769,-67.31 -55.245,-65.786 -55.245,-63.5 -55.88,-62.865 U2.3
NetR15_1: R15.1 R21.1 U3.3 | length 12.7
  Top Layer w0.762: R15.1 R21.1
  Bottom Layer w0.762: R21.1 -56.769,-33.655 -55.245,-32.131 -55.245,-29.845 -55.88,-29.21 U3.3
NetR25_1: R25.1 R26.2 U1.6 | length 14.8
  Top Layer w0.762: U1.6 -49.149,-96.52 -47.244,-94.615 -44.45,-94.615 -41.275,-91.44 R26.2
NetR26_1: R26.1 R31.2 U1.7 | length 6.8
  Top Layer w0.762: U1.7 R26.1 R31.2
NetR27_1: R27.1 R28.2 U2.6 | length 5.9
  Top Layer w0.762: U2.6 -48.26,-62.865 -47.879,-62.484 -46.99,-62.484 ; R27.1 R28.2
NetR28_1: R28.1 R32.2 U2.7 | length 15.1
  Top Layer w0.762: U2.7 R32.2 -44.45,-57.785 -41.275,-60.96 R28.1
NetR29_1: R29.1 R30.2 U3.6 | length 5.9
  Top Layer w0.762: U3.6 -48.26,-29.21 -47.879,-28.829 -46.99,-28.829 ; R29.1 R30.2
NetR30_1: R30.1 R33.2 U3.7 | length 15.1
  Top Layer w0.762: U3.7 R33.2 -44.45,-24.13 -41.275,-27.305 R30.1
NetR31_1: R31.1 R35.2 R37.1 | length 6.3
  Top Layer w0.762: R37.1 R35.2 R31.1
NetR34_1: R34.1 R40.1 U1.5 | length 5.9
  Top Layer w0.762: U1.5 -48.26,-99.06 -47.879,-99.441 -46.99,-99.441 ; R34.1 R40.1
NetR35_1: R35.1 R41.1 U2.5 | length 18.9
  Top Layer w0.762: U2.5 -49.53,-66.675 -48.895,-67.31 R41.1 -41.91,-67.31 -36.83,-72.39 R35.1
NetR36_1: R36.1 R42.1 U3.5 | length 7.2
  Top Layer w0.762: U3.5 -49.53,-33.02 -48.895,-33.655 R42.1 R36.1
NetR46_1: R46.1 VD1.1 | length 5.6
  Top Layer w0.762: VD1.1 1.25,32.405 2.54,31.115 R46.1
NetR51_2: R51.2 VD1.2 | length 5.6
  Top Layer w0.762: R51.2 -2.54,31.115 -1.27,32.385 -1.27,34.27 VD1.2
PGND: C34.1 PWR1.2 R43.1 SW1.0 | length 332.2
  Top Layer w5.08: -10.16,-6.35 -10.16,-20.955 -5.715,-25.4 5.715,-25.4 10.16,-20.955 10.16,-6.35 ; 0,-25.4 0,-95.25 12.7,-107.95 v3(12.7,-116.84)
  Bottom Layer w1.778: -76.835,-119.38 77.47,-119.38 ; 12.7,-119.38 v3(12.7,-116.84) ; 25.4,-119.38 C34.1 ; 31.75,-119.38 R43.1 ; 43.18,-119.38 SW1.0 ; 58.42,-119.38 PWR1.2
  other v1: -78.105,-115.57 78.105,-115.57 -78.105,-102.87 78.105,-102.87 -78.105,-90.17 78.105,-90.17 -78.105,-77.47 78.105,-77.47 -78.105,-64.77 78.105,-64.77 -78.105,-52.07 78.105,-52.07 -78.105,-39.37 78.105,-39.37 -78.105,-26.67 78.105,-26.67 -78.105,-13.97 78.105,-13.97 -78.105,-1.27 78.105,-1.27 -78.105,11.43 78.105,11.43 -78.105,24.13 78.105,24.13 -78.105,36.83 78.105,36.83
V+: C23.1 C48.1 L2.2 R3.1 R46.2 TP4.1 | length 89.7
  Top Layer w1.27: R3.1 C48.1 -8.255,-1.27 -5,-4.525 TP4.1 L2.2@-5,-10.545 ; L2.2 -2.54,-10.795 2.54,-5.715 R46.2
V-: C32.2 C49.2 L3.2 R24.1 R51.1 TP6.1 | length 90.9
  Top Layer w1.27: R24.1 -64.77,0 -63.5,1.27 -8.255,1.27 -5,4.525 TP6.1 L3.2@-5,10.545 ; L3.2 L3.2@-5,10.545 ; R51.1 -2.54,10.795 -2.79,10.545 L3.2@-5,10.545
pads on no net: SW1.1 TR2.2 TR2.3 TR2.4 TR2.8 TR3.0
copper on no net: | length 58.4
  Top Layer w5.08: -10.16,6.35 -10.16,35.56 ; 10.16,6.35 10.16,35.56

## Polygon pours and split planes (outlines as drawn)
PGND on Top Layer "PGND_TOPL" (solid, remove dead copper, pour order 1003): -80.01,-120.65 -76.2,-120.65 -76.2,38.735 -80.01,38.735
PGND on Top Layer "PGND_TOPR" (solid, remove dead copper, pour order 1002): 80.01,-120.65 76.2,-120.65 76.2,38.735 80.01,38.735
PGND on Bottom Layer "PGND_BOTR" (solid, remove dead copper, pour order 1001): 76.2,38.735 80.01,38.735 80.01,-120.65 76.2,-120.65
PGND on Bottom Layer "PGND_BOTL" (solid, remove dead copper, pour order 1000): -76.2,-120.65 -80.01,-120.65 -80.01,38.735 -76.2,38.735
GND on Bottom Layer "BOT_GND" (solid, remove dead copper, pour order 1000): -76.2,-118.11 76.2,-118.11 76.2,38.735 -76.2,38.735

## Keep-outs
Keep-Out Layer:
  lines w0.254: -76.2,-120.65 76.2,-120.65 ; -76.2,-118.11 -76.2,38.735 76.2,38.735 76.2,-118.11

## Other copper
Top Layer:
  text "github.com/ivasilev/diy-electronics" at 67.945,22.225 h1.52 r180
  text "Zond Phono Preamp" at 57.15,18.415 h3.3 r180
  text "PWR" at 56.515,-104.14 h1.52
  text "In-L" at -65.405,-107.95 h1.52
  text "In-R" at -45.085,-107.95 h1.52
  text "Out-L" at -19.685,-114.935 h1.52
  text "Out-R" at 0.635,-114.935 h1.52
Bottom Layer:
  pour cut-out: 16.51,-120.65 16.51,-46.355 22.86,-40.005 76.2,-40.005 76.2,-120.65

## Silkscreen, mask and mechanical layers (free items; w line width, h text height)
Top Overlay:
  lines w0.254: 44.45,-21.59 44.45,24.765
Top Solder:
  region: 76.2,38.735 80.01,38.735 80.01,-120.65 76.2,-120.65
  region: -80.01,38.735 -76.2,38.735 -76.2,-120.65 -80.01,-120.65
  lines w5.08: -10.16,-6.35 -10.16,-20.955 -5.715,-25.4 5.715,-25.4 10.16,-20.955 10.16,-6.35 ; -10.16,6.35 -10.16,35.56 ; 0,-25.4 0,-95.25 12.7,-107.95 12.7,-116.84 ; 10.16,6.35 10.16,35.56
Bottom Solder:
  region: -76.2,-120.65 -80.01,-120.65 -80.01,38.735 -76.2,38.735
  region: 80.01,-120.65 76.2,-120.65 76.2,38.735 80.01,38.735
Mechanical 1:
  the board outline again, w0.254

## Text inside footprints (layer, text, board x,y; h text height)
C1: Top Overlay "+" at -51.22,-83.3 h1.5
C2: Top Overlay "+" at -51.22,-52.82 h1.5
C3: Top Overlay "+" at -51.22,-19.165 h1.5
C10: Top Overlay "+" at -66.46,-83.3 h1.5
C11: Top Overlay "+" at -66.46,-52.82 h1.5
C12: Top Overlay "+" at -66.46,-19.165 h1.5
C22: Top Overlay "+" at 61.075,-5.23 h1.5 r90
C23: Top Overlay "+" at -40.41,-12.23 h3 r90
C27: Top Overlay "+" at 61.825,-12.23 h3 r90
C30: Top Overlay "+" at 27.825,7.77 h1.5 r270
C31: Top Overlay "+" at 27.075,14.77 h3 r270
C32: Top Overlay "+" at -66.27,14.77 h3 r270
C48: Top Overlay "+" at -41.16,-5.23 h1.5 r90
C49: Top Overlay "+" at -65.52,7.77 h1.5 r270